# EAGLE board board (EAGLE 5.12)

No outline drawn. Coordinates in mm, seen from the top.
Copper layers (1*16): Top 0.035mm / dielectric 1.5mm / Bottom 0.035mm
Design rules "default": minimum track width 10mil, minimum drill 24mil, track to track 8mil, track to pad 8mil, pad to pad 8mil, via to via 8mil, smd to smd 8mil, copper to edge 40mil, drill to drill 8mil, minimum pad ring 10mil, minimum via ring 8mil, stop-mask expansion 4mil, vias tented up to drill 0mil, thermal gap 10mil

## Footprints (pad centres in the part's own frame; a part is rotated, then mirrored left to right if it is on the bottom)
1X06/90 = drill 1.016 long: 1 -6.35,-3.81; 2 -3.81,-3.81; 3 -1.27,-3.81; 4 1.27,-3.81; 5 3.81,-3.81; 6 6.35,-3.81
AK300/3 = drill 1.321 long: 1 -5.004,0; 2 0,0; 3 5.004,0
AK300/2 = drill 1.321 long: 1 -2.515,0; 2 2.489,0

## Placement (x,y rotation side)
E$1  [1X06/90]  35.56,73.66 0 top
E$2  [AK300/3]  13.97,44.45 270 top
E$3  [AK300/3]  13.97,27.94 270 top
E$4  [AK300/2]  71.12,45.72 90 top
E$5  [AK300/2]  71.12,34.29 90 top
E$6  [AK300/2]  71.12,13.97 90 top
E$7  [AK300/2]  71.12,2.54 90 top

## Library data of the parts
E$1 = pinhead
E$2-E$7 = con-ptr500

## Tracks (layer width: path | path; a pad name or v marks a point on that pad's centre or on a via)
(copper drawn outside any net)
  shapes: Bottom area x1

## Text on the board
Bottom: RESET | MISO | MOSI | SCK | +5V | GND | DOWN | TOP BREAK | COMMON (+5V) | UP | UP | BOTTOM BREAK | COMMON (+5V) | DOWN | BROWN | GREEN | BLACK | WHITE